# Altium PCB bigMama.PcbDoc
Units mil, origin at the board's own origin, x right, y up, seen from the top; angles counter-clockwise.
Board outline 985 x 1970 mil, 2 copper layers (Top Layer, Bottom Layer); 53 components, 35 nets, 174 pads, 0 vias.
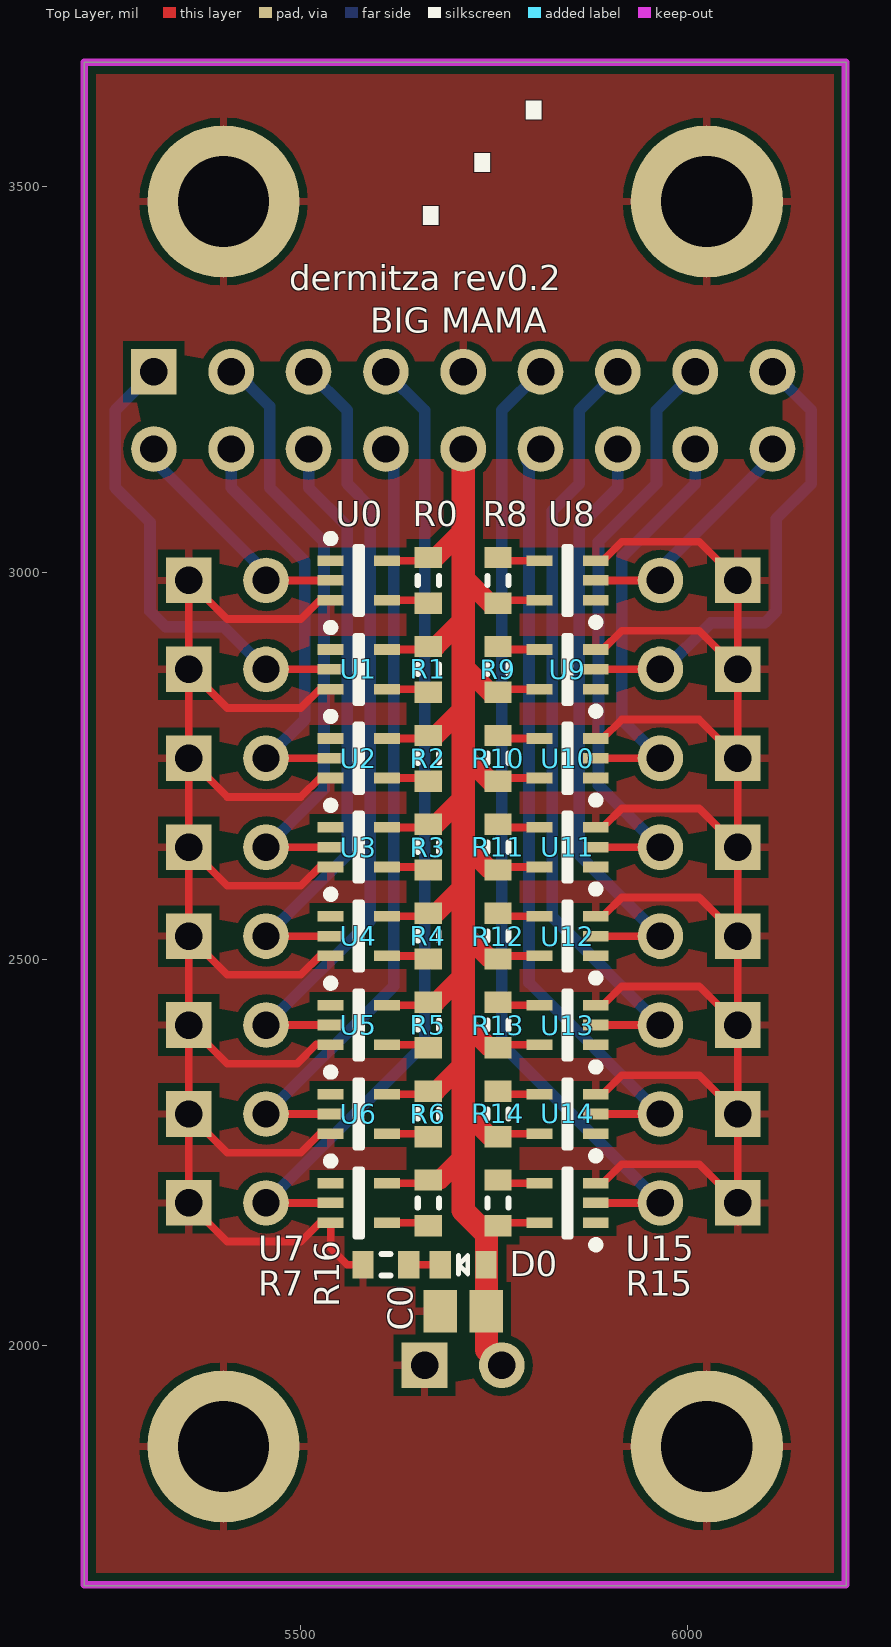
[diagram p0: Top Layer view]
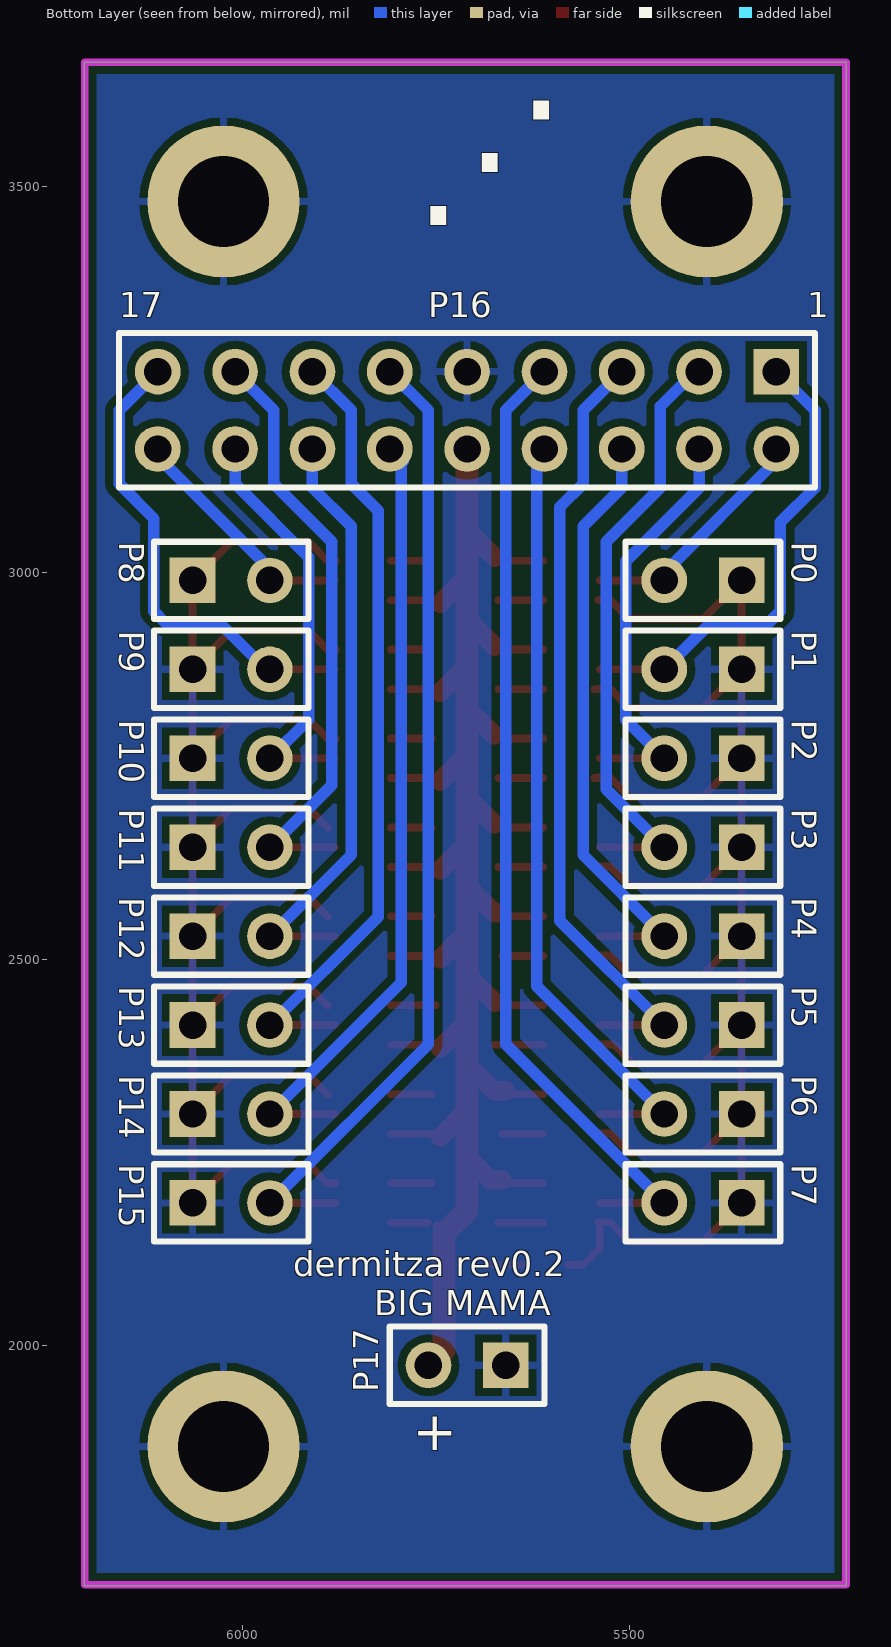
[diagram p1: Bottom Layer view, seen from below]

## Layer stack, top to bottom
Top Layer: signal copper 1.4
Dielectric: dielectric 12.6, FR-4, Dk 4.8
Bottom Layer: signal copper 1.4

## Board outline
5220,3660 5220,1690 6205,1690 6205,3660 5220,3660

## Design rules (kind name [scope] priority, off if disabled: settings)
Clearance [All] p1: gap=10
ComponentClearance [All] p1: gap=4 collisioncheckmode=3 verticalgap=4 showdistances=FALSE
HoleToHoleClearance [All] p1: gap=4 allowstackedmicrovias=TRUE
PolygonConnect [All] p1: connectstyle=Relief reliefconductorwidth=10 reliefentries=4 polygonreliefangle="90 Angle"
RoutingVias [All] p1: holewidth=28 width=50 viastyle="Through Hole" minholewidth=28 minwidth=50 maxholewidth=28 maxwidth=50
SilkToSilkClearance [All] p1: silktosilkclearance=4
SilkscreenOverComponentPads [All] p1: minsilkscreentomaskgap=4
SolderMaskExpansion [All] p1: expansion=4
Width [All] p1: maxlimit=50 minlimit=6 preferedwidth=10 minimp=50.000000 maximp=50.000000 favimp=50.000000
24 further rules are at their usual default settings.

## Components (designator, comment, footprint, x,y, rotation, side; value= is the part's Value field where it differs from the comment)
C0 "10uF" 0805_CAP 5710,2045 r0 top
D0 "BLUE" 0603_LED 5710,2105 r180 top
P0 "S0" HDR1X2 5355,2990 r0 bottom
P1 "S0" HDR1X2 5355,2875 r0 bottom
P2 "S0" HDR1X2 5355,2760 r0 bottom
P3 "S0" HDR1X2 5355,2645 r0 bottom
P4 "S0" HDR1X2 5355,2530 r0 bottom
P5 "S0" HDR1X2 5355,2415 r0 bottom
P6 "S0" HDR1X2 5355,2300 r0 bottom
P7 "S0" HDR1X2 5355,2185 r0 bottom
P8 "S0" HDR1X2 6065,2990 r180 bottom
P9 "S0" HDR1X2 6065,2875 r180 bottom
P10 "S0" HDR1X2 6065,2760 r180 bottom
P11 "S0" HDR1X2 6065,2645 r180 bottom
P12 "S0" HDR1X2 6065,2530 r180 bottom
P13 "S0" HDR1X2 6065,2415 r180 bottom
P14 "S0" HDR1X2 6065,2300 r180 bottom
P15 "S0" HDR1X2 6065,2185 r180 bottom
P16 "Header 9X2" HDR2X9 5310,3260 r0 bottom
P17 "Header 2" HDR1X2 5660,1975 r0 bottom
R0 "5k" 0603_RES 5665,2990 r90 top
R1 "5k" 0603_RES 5665,2875 r90 top
R2 "5k" 0603_RES 5665,2760 r90 top
R3 "5k" 0603_RES 5665,2645 r90 top
R4 "5k" 0603_RES 5665,2530 r90 top
R5 "5k" 0603_RES 5665,2415 r90 top
R6 "5k" 0603_RES 5665,2300 r90 top
R7 "5k" 0603_RES 5665,2185 r90 top
R8 "5k" 0603_RES 5755,2990 r270 top
R9 "5k" 0603_RES 5755,2875 r270 top
R10 "5k" 0603_RES 5755,2760 r270 top
R11 "5k" 0603_RES 5755,2645 r270 top
R12 "5k" 0603_RES 5755,2530 r270 top
R13 "5k" 0603_RES 5755,2415 r270 top
R14 "5k" 0603_RES 5755,2300 r270 top
R15 "5k" 0603_RES 5755,2185 r270 top
R16 "220" 0603_RES 5610,2105 r0 top
U0 "PSSI2021SAY" SOT65P210X110-5N 5575,2990 r0 top
U1 "PSSI2021SAY" SOT65P210X110-5N 5575,2875 r0 top
U2 "PSSI2021SAY" SOT65P210X110-5N 5575,2760 r0 top
U3 "PSSI2021SAY" SOT65P210X110-5N 5575,2645 r0 top
U4 "PSSI2021SAY" SOT65P210X110-5N 5575,2530 r0 top
U5 "PSSI2021SAY" SOT65P210X110-5N 5575,2415 r0 top
U6 "PSSI2021SAY" SOT65P210X110-5N 5575,2300 r0 top
U7 "PSSI2021SAY" SOT65P210X110-5N 5575,2185 r0 top
U8 "PSSI2021SAY" SOT65P210X110-5N 5845,2990 r180 top
U9 "PSSI2021SAY" SOT65P210X110-5N 5845,2875 r180 top
U10 "PSSI2021SAY" SOT65P210X110-5N 5845,2760 r180 top
U11 "PSSI2021SAY" SOT65P210X110-5N 5845,2645 r180 top
U12 "PSSI2021SAY" SOT65P210X110-5N 5845,2530 r180 top
U13 "PSSI2021SAY" SOT65P210X110-5N 5845,2415 r180 top
U14 "PSSI2021SAY" SOT65P210X110-5N 5845,2300 r180 top
U15 "PSSI2021SAY" SOT65P210X110-5N 5845,2185 r180 top

## Footprints (in the part's own frame and the unit in brackets; to place one, negate y for a bottom-side part, rotate by r counter-clockwise, add the part's x,y. Pads: shape width x height; smd on the part's side, far side on the other; paste and mask are expansions set on the pad)
0603_LED [mm] "Chip LED, 2-Leads, Body 1.6x0.8mm, IPC High Density"
  rect 0.7x0.9 smd: 1(-0.75,0) 2(0.75,0)
  silkscreen extent -0.15,-0.3 0.15,0.3, body extent -0.85,-0.48 0.85,0.48, height 0.6
0603_RES [mm] "Chip Resistor, 2-Leads, Body 1.6x0.8mm, IPC High Density"
  rect 0.7x0.9 smd: 1(-0.75,0) 2(0.75,0)
  silkscreen extent -0.15,-0.35 0.15,0.35, body extent -0.85,-0.48 0.85,0.48, height 0.6
0805_CAP [mm] "Chip Capacitor, 2-Leads, Body 2.0x1.3mm, IPC High Density"
  rect 1.1x1.4 smd: 1(-0.75,0) 2(0.75,0)
  body extent -1.1,-0.72 1.1,0.73, height 1.1
HDR1X2 [mm] "Connector; Header; 2 Position"
  rect 1.5x1.5 hole 0.9: 1(0,0)
  round 1.5 hole 0.9: 2(2.54,0)
  silkscreen extent -1.27,-1.27 3.81,1.27
HDR2X9 [mm] "Connector; Header; 9x2 Position"
  rect 1.5x1.5 hole 0.9: 1(0,0)
  round 1.5 hole 0.9: 2(0,2.54) 3(2.54,0) 4(2.54,2.54) 5(5.08,0) 6(5.08,2.54) 7(7.62,0) 8(7.62,2.54) 9(10.16,0) 10(10.16,2.54) 11(12.7,0) 12(12.7,2.54) 13(15.24,0) 14(15.24,2.54) 15(17.78,0) 16(17.78,2.54) 17(20.32,0) 18(20.32,2.54)
  silkscreen extent -1.27,-1.27 21.59,3.81
SOT65P210X110-5N [mm] "SOT23, 5-Leads, Body 2.2x2.2mm (max), Pitch 0.65mm, IPC Medium Density"
  rect 0.85x0.35 smd: 1(-0.925,0.65) 2(-0.925,0) 3(-0.925,-0.65) 4(0.925,-0.65) 5(0.925,0.65)
  silkscreen extent -1.05,-1.1 0.1,1.5, body extent -0.67,-1.1 0.67,1.1, height 1.1

## Part data
C0: library part CAP_SMD, "Chip Capacitor"
D0: library part LED_SMD
P0 P1 P2 P3 P4 P5 P6 P7 P8 P9 P10 P11 P12 P13 P14 P15: library part "Header 2", "Header, 2-Pin"
P16: "Header, 9-Pin, Dual row"
P17: "Header, 2-Pin"
R0 R1 R2 R3 R4 R5 R6 R7 R8 R9 R10 R11 R12 R13 R14 R15 R16: library part RES_SMD

## Free pads (board coordinates)
  round 196.85 hole 118.11: 0(5400,3480) 1(6025,3480) 2(5400,1870) 3(6025,1870)

## Nets (pads, with @x,y where several pads share a name; then routed paths per layer and width w, separated by ;. In a path a pad name is that pad's centre, name@x,y a point inside that pad or via, vN(x,y) a via of type N, cw(c..) or ccw(c..) an arc to the next point about the centre after c; other vN are vias at no path point)
GND: C0.1 P0.1 P1.1 P2.1 P3.1 P4.1 P5.1 P6.1 P7.1 P8.1 P9.1 P10.1 P11.1 P12.1 P13.1 P14.1 P15.1 P16.9 P17.1 pad.0 pad.1 pad.2 pad.3 R16.1 U0.3 U1.3 U2.3 U3.3 U4.3 U5.3 U6.3 U7.3 U8.3 U9.3 U10.3 U11.3 U12.3 U13.3 U14.3 U15.3 | length 5217.4
  Top Layer w10: P7.1@5350,2185 P7.1 ; P6.1@5350,2300 P6.1 ; P5.1@5350,2415 P5.1 ; P4.1@5350,2530 P4.1 ; P3.1@5350,2645 P3.1 ; P2.1@5350,2760 P2.1 ; P1.1@5350,2875 P1.1 ; P0.1@5350,2990 P0.1 ; U7.3 5538.58,2126.42 5560,2105 R16.1@5580,2105 ; U6.3 U6.3@5545.59,2274.41 ; U5.3 U5.3@5545.59,2389.41 ; U4.3 U4.3@5545.59,2504.41 ; U3.3 U3.3@5545.59,2619.41 ; U2.3 U2.3@5545.59,2734.41 ; U1.3 U1.3@5545.59,2849.41 ; U7.3@5540,2160 5525,2160 5500,2135 5405,2135 P7.1 ; U6.3@5540,2275 5525,2275 5500,2250 5405,2250 P6.1 ; U5.3@5540,2390 5520,2390 5495,2365 5405,2365 P5.1 ; U4.3@5540,2505 5525,2505 5500,2480 5405,2480 P4.1 ; U3.3@5540,2620 5525,2620 5500,2595 5405,2595 P3.1 ; U2.3@5540,2735 5525,2735 5500,2710 5405,2710 P2.1 ; U1.3@5540,2850 5525,2850 5500,2825 5405,2825 P1.1 ; U0.3@5540,2965 5525,2965 5500,2940 5405,2940 P0.1 ; U15.3@5880,2210 5890,2210 5915,2235 6015,2235 P15.1 ; U10.3@5880,2785 5890,2785 5915,2810 6015,2810 P10.1 ; U9.3@5880,2900 5890,2900 5915,2925 6015,2925 P9.1 ; U8.3@5880,3015 5890,3015 5915,3040 6015,3040 P8.1 P9.1 ; U14.3@5890,2325 5915,2350 6015,2350 P14.1 ; U13.3@5890,2440 5915,2465 6015,2465 P13.1 ; U12.3@5890,2555 5915,2580 6015,2580 P12.1 ; U11.3@5890,2670 5915,2695 6015,2695 P11.1 ; P15.1@6065,2160 P15.1 ; P7.1 P6.1 ; P6.1 P5.1 ; P5.1 P4.1 ; P4.1 P3.1 ; P3.1 P2.1 ; P2.1 P1.1 ; P1.1 P0.1 ; P15.1 P14.1 ; P14.1 P13.1 ; P13.1 P12.1 ; P12.1 P11.1 ; P11.1 P10.1 ; P10.1 P9.1
IOUT0: P0.2 P16.2 U0.2 | length 308.6
  Top Layer w10: P0.2 U0.2
  Bottom Layer w10: P16.2@5310,3145 P16.2@5310,3155 ; P0.2 P0.2@5455,3000
  Bottom Layer w15: P16.2@5310,3145 P0.2@5455,3000
IOUT1: P1.2 P16.1 U1.2 | length 614
  Top Layer w10: P1.2 U1.2
  Bottom Layer w15: P16.1 5260,3210 5260,3110 5305,3065 5305,2950 5325,2930 5400,2930 P1.2
IOUT2: P2.2 P16.4 U2.2 | length 543.6
  Top Layer w10: P2.2 U2.2
  Bottom Layer w15: P16.4 5410,3110 5505,3015 5505,2810 P2.2
IOUT3: P3.2 P16.3 U3.2 | length 784.4
  Top Layer w10: P3.2 U3.2
  Bottom Layer w15: P16.3@5410,3265 5460,3215 5460,3110 5530,3040 5530,2720 P3.2
IOUT4: P4.2 P16.6 U4.2 | length 777.8
  Top Layer w10: P4.2 U4.2
  Bottom Layer w15: P4.2 5560,2635 5560,3060 5510,3110 P16.6
IOUT5: P5.2 P16.5 U5.2 | length 1017.6
  Top Layer w10: P5.2 U5.2
  Bottom Layer w15: P5.2 5590,2550 5590,3085 5560,3115 5560,3210 P16.5
IOUT6: P6.2 P16.8 U6.2 | length 1016.1
  Top Layer w10: P6.2 U6.2
  Bottom Layer w15: P6.2 5620,2465 5620,3150 P16.8
IOUT7: P7.2 P16.7 U7.2 | length 1264.2
  Top Layer w10: P7.2 U7.2
  Bottom Layer w15: P7.2 5660,2390 5660,3210 P16.7
IOUT8: P8.2 P16.18 U8.2 | length 313.6
  Top Layer w10: U8.2 P8.2
  Bottom Layer w10: P8.2 P8.2@5965,3005 ; P16.18@6110,3150 P16.18
  Bottom Layer w15: P8.2@5965,3005 P16.18@6110,3150
IOUT9: P9.2 P16.17 U9.2 | length 614
  Top Layer w10: U9.2 P9.2
  Bottom Layer w10: P9.2 P9.2@5970,2875
  Bottom Layer w15: P9.2@5970,2875 6030,2935 6100,2935 6115,2950 6115,3070 6160,3115 6160,3210 P16.17
IOUT10: P10.2 P16.16 U10.2 | length 543.6
  Top Layer w10: U10.2 P10.2
  Bottom Layer w15: P10.2 5915,2810 5915,3020 6010,3115 P16.16
IOUT11: P11.2 P16.15 U11.2 | length 783.5
  Top Layer w10: U11.2 P11.2
  Bottom Layer w15: P11.2 5885,2725 5885,3040 5960,3115 5960,3210 P16.15
IOUT12: P12.2 P16.14 U12.2 | length 777.8
  Top Layer w10: U12.2 P12.2
  Bottom Layer w15: P16.14 5910,3110 5860,3060 5860,2635 P12.2
IOUT13: P13.2 P16.13 U13.2 | length 1021.8
  Top Layer w10: U13.2 P13.2
  Bottom Layer w15: P16.13 5860,3210 5860,3115 5825,3080 5825,2555 P13.2
IOUT14: P14.2 P16.12 U14.2 | length 1020.2
  Top Layer w10: U14.2 P14.2
  Bottom Layer w15: P16.12@5795,3145 5795,2470 P14.2
  Bottom Layer w20: P16.12@5795,3145 P16.12
IOUT15: P15.2 P16.11 U15.2 | length 1265.6
  Top Layer w10: U15.2@5880,2185 U15.2 P15.2
  Bottom Layer w15: P16.11 5760,3210 5760,2390 P15.2
NetD0_2: D0.2 R16.2 | length 40.9
  Top Layer w10: R16.2 D0.2
NetR0_1: R0.1 U0.4 | length 58
  Top Layer w10: U0.4 R0.1@5669.41,2964.41
NetR1_1: R1.1 U1.4 | length 58
  Top Layer w10: U1.4 R1.1@5669.41,2849.41
NetR2_1: R2.1 U2.4 | length 58
  Top Layer w10: U2.4 R2.1@5669.41,2734.41
NetR3_1: R3.1 U3.4 | length 58
  Top Layer w10: U3.4 R3.1@5669.41,2619.41
NetR4_1: R4.1 U4.4 | length 53
  Top Layer w10: U4.4 R4.1@5664.41,2504.41
NetR5_1: R5.1 U5.4 | length 63
  Top Layer w10: U5.4 R5.1@5674.41,2389.41
NetR6_1: R6.1 U6.4 | length 53
  Top Layer w10: U6.4 R6.1@5664.41,2274.41
NetR7_1: R7.1 U7.4 | length 58
  Top Layer w10: U7.4 R7.1@5669.41,2159.41
NetR8_1: R8.1 U8.4 | length 48
  Top Layer w10: R8.1@5760.59,3015.59 U8.4
NetR9_1: R9.1 U9.4 | length 49.2
  Top Layer w10: R9.1@5759.41,2900.59 U9.4
NetR10_1: R10.1 U10.4 | length 53
  Top Layer w10: R10.1@5755.59,2785.59 U10.4
NetR11_1: R11.1 U11.4 | length 53
  Top Layer w10: R11.1@5755.59,2670.59 U11.4
NetR12_1: R12.1 U12.4 | length 53
  Top Layer w10: R12.1@5755.59,2555.59 U12.4
NetR13_1: R13.1 U13.4 | length 58
  Top Layer w10: R13.1@5750.59,2440.59 U13.4
NetR14_1: R14.1 U14.4 | length 53
  Top Layer w10: R14.1@5755.59,2325.59 U14.4
NetR15_1: R15.1 U15.4 | length 53
  Top Layer w10: R15.1@5755.59,2210.59 U15.4
VCC: C0.2 D0.1 P16.10 P17.2 R0.2 R1.2 R2.2 R3.2 R4.2 R5.2 R6.2 R7.2 R8.2 R9.2 R10.2 R11.2 R12.2 R13.2 R14.2 R15.2 U0.5 U1.5 U2.5 U3.5 U4.5 U5.5 U6.5 U7.5 U8.5 U9.5 U10.5 U11.5 U12.5 U13.5 U14.5 U15.5 | length 2875.1
  Top Layer w10: U7.5 5660.59,2210.59 R7.2@5665,2215 ; U6.5 R6.2@5670.59,2325.59 ; U5.5 R5.2@5665.59,2440.59 ; U4.5 5665.59,2555.59 R4.2@5670,2560 ; U3.5 R3.2@5669.41,2670.59 ; U2.5 R2.2@5665.59,2785.59 ; U1.5 R1.2@5669.41,2900.59 ; U0.5 R0.2@5669.41,3015.59 ; R5.2@5670,2440 R5.2@5674.53,2444.53 ; R5.2@5670,2444.53 R5.2@5674.53,2444.53 ; R0.2@5670,3019.53 R0.2@5674.53,3019.53 ; R5.2@5675.47,2444.53 R5.2@5674.53,2444.53 ; R15.2@5744.53,2155.47 R15.2@5750,2155.47 ; R14.2@5744.53,2270.47 R14.2@5750,2270.47 ; R13.2@5744.53,2385.47 R13.2@5750,2385.47 ; R12.2@5744.53,2500.47 R12.2@5750,2500.47 ; R11.2@5744.53,2615.47 R11.2@5750,2615.47 ; R10.2@5744.53,2730.47 R10.2@5750,2730.47 ; R9.2@5744.53,2845.47 R9.2@5750,2845.47 ; R8.2@5744.53,2960.47 R8.2@5750,2960.47 ; R14.2@5755.59,2274.41 U14.5 ; R13.2@5755.59,2389.41 U13.5 ; R8.2@5755.59,2964.41 U8.5 ; R15.2@5760.59,2159.41 U15.5 ; R12.2@5760.59,2504.41 U12.5 ; R11.2@5760.59,2619.41 U11.5 ; R10.2@5760.59,2734.41 U10.5 ; R9.2@5760.59,2849.41 U9.5
  Top Layer w25: R6.2@5660,2330 5675,2330 5710,2365 ; R7.2@5665,2215 5680,2215 5705,2240 ; R4.2@5670,2560 5675,2560 5707.5,2592.5 ; R5.2@5674.53,2444.53 5710,2480 ; R0.2@5674.53,3019.53 5710,3055 ; R3.2@5675,2675 5707.5,2707.5 ; R2.2@5675,2790 5710,2825 ; R1.2@5675,2905 5710,2940 ; 5710,2305 R14.2@5744.53,2270.47 ; 5710,2420 R13.2@5744.53,2385.47 ; 5710,2535 R12.2@5744.53,2500.47 ; 5710,2650 R11.2@5744.53,2615.47 ; 5710,2765 R10.2@5744.53,2730.47 ; 5710,2880 R9.2@5744.53,2845.47 ; 5710,2995 R8.2@5744.53,2960.47
  Top Layer w30: P16.10 5710,3055 5710,2995 5710,2940 5710,2880 5710,2765 5710,2650 5710,2535 5710,2420 5710,2305 5710,2175 5740,2145 5740,1995 P17.2
pads on no net: U0.1 U1.1 U2.1 U3.1 U4.1 U5.1 U6.1 U7.1 U8.1 U9.1 U10.1 U11.1 U12.1 U13.1 U14.1 U15.1

## Polygon pours and split planes (outlines as drawn)
GND on Bottom Layer "GND2" (solid, remove dead copper, pour order 6): 6205,3660 6205,1690 5220,1690 5220,3660 6205,3660
GND on Top Layer "GND" (solid, remove dead copper, pour order 4): 5220,3660 5220,1690 6205,1690 6205,3660 5220,3660

## Keep-outs
Keep-Out Layer:
  lines w10: 5220,1691.34 5220,3660 6204.33,3660 6204.33,1691.34 5220,1691.34

## Silkscreen, mask and mechanical layers (free items; w line width, h text height)
Top Overlay:
  text "⋰" at 5635,3420 h250
  text "dermitza rev0.2" at 5485,3365 h32
  text "BIG MAMA" at 5590,3310 h32
Bottom Overlay:
  text "⋰" at 5780,3420 h250
  text "dermitza rev0.2" at 5935,2090 h32
  text "BIG MAMA" at 5830,2040 h32
  text "+" at 5780,1865 h50

## Dimensions
5220,3660 to 5220,1691.34 on Top Overlay
5220,3660 to 6204.33,3660 on Top Overlay

## Text inside footprints (layer, text, board x,y; h text height)
P16: Bottom Overlay "17" at 6160,3330 h32; Bottom Overlay "1" at 5270,3330 h32